# EAGLE board mouthbrain (EAGLE 5.12)
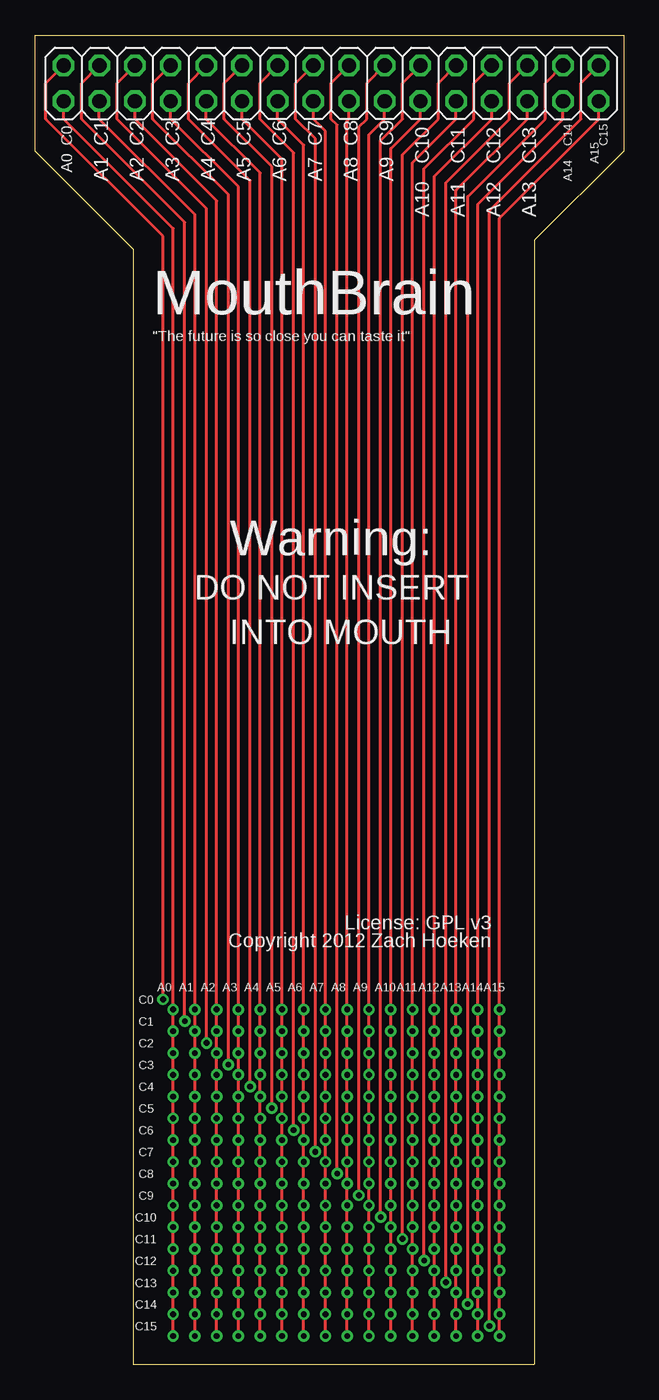
[diagram p0: board, top side]
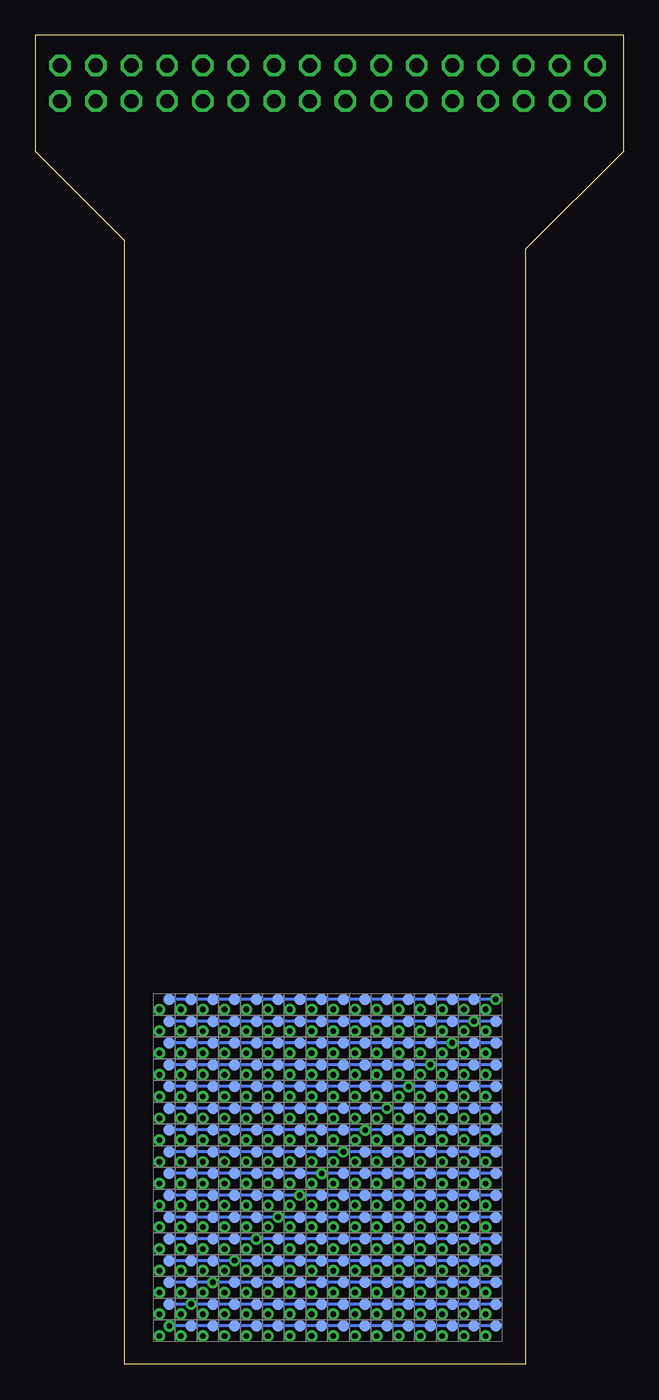
[diagram p1: board, bottom side, seen from below]

Size 41.91 x 94.61 mm. Coordinates in mm from the lower left corner, seen from the top.
Outline: 0,86.36 6.99,79.38 6.99,0 35.56,0 35.56,80.01 41.91,86.36 41.91,94.61 0,94.61 0,86.36
Copper layers (1*16): Top 0.035mm / dielectric 1.5mm / Bottom 0.035mm
Design rules "default *": minimum track width 8mil, minimum drill 16mil, track to track 7mil, track to pad 7mil, pad to pad 7mil, via to via 7mil, smd to smd 7mil, copper to edge 40mil, drill to drill 8mil, minimum pad ring 8mil, minimum via ring 8mil, stop-mask expansion 2mil, vias tented up to drill 0mil, thermal gap 10mil
Net classes: 0 default: width 0.178 mm, clearance 0.178 mm

## Footprints (pad centres in the part's own frame; a part is rotated, then mirrored left to right if it is on the bottom)
2X16 = drill 1.016 octagon: 1 -19.05,-1.27; 2 -19.05,1.27; 3 -16.51,-1.27; 4 -16.51,1.27; 5 -13.97,-1.27; 6 -13.97,1.27; 7 -11.43,-1.27; 8 -11.43,1.27; 9 -8.89,-1.27; 10 -8.89,1.27; 11 -6.35,-1.27; 12 -6.35,1.27; 13 -3.81,-1.27; 14 -3.81,1.27; 15 -1.27,-1.27; 16 -1.27,1.27; 17 1.27,-1.27; 18 1.27,1.27; 19 3.81,-1.27; 20 3.81,1.27; 21 6.35,-1.27; 22 6.35,1.27; 23 8.89,-1.27; 24 8.89,1.27; 25 11.43,-1.27; 26 11.43,1.27; 27 13.97,-1.27; 28 13.97,1.27; 29 16.51,-1.27; 30 16.51,1.27; 31 19.05,-1.27; 32 19.05,1.27
61MIL = drill 0.406 pad 0.813 round: + 0,0 | smd 0.813 x 0.813 rotated 135: - 0.718,0.718
61MILJCT = drill 0.406 pad 0.813 round: + 0,0; - 0.718,0.718

## Placement (x,y rotation side)
JP1  [2X16]  21.08,91.19 0 top
U$1  ELECTRODE60MIL  [61MIL]  9.83,2.02 0 bottom
U$2  ELECTRODE60MIL  [61MIL]  11.38,2.02 0 bottom
U$3  ELECTRODE60MIL  [61MIL]  12.93,2.02 0 bottom
U$4  ELECTRODE60MIL  [61MIL]  14.48,2.02 0 bottom
U$5  ELECTRODE60MIL  [61MIL]  16.03,2.02 0 bottom
U$6  ELECTRODE60MIL  [61MIL]  17.58,2.02 0 bottom
U$7  ELECTRODE60MIL  [61MIL]  19.13,2.02 0 bottom
U$8  ELECTRODE60MIL  [61MIL]  20.68,2.02 0 bottom
U$9  ELECTRODE60MIL  [61MIL]  22.23,2.02 0 bottom
U$10  ELECTRODE60MIL  [61MIL]  23.77,2.02 0 bottom
U$11  ELECTRODE60MIL  [61MIL]  25.32,2.02 0 bottom
U$12  ELECTRODE60MIL  [61MIL]  26.87,2.02 0 bottom
U$13  ELECTRODE60MIL  [61MIL]  28.42,2.02 0 bottom
U$14  ELECTRODE60MIL  [61MIL]  29.97,2.02 0 bottom
U$15  ELECTRODE60MIL  [61MIL]  31.52,2.02 0 bottom
U$16  ELECTRODE61MILJCT  [61MILJCT]  33.07,2.02 0 bottom
U$17  ELECTRODE60MIL  [61MIL]  9.83,3.57 0 bottom
U$18  ELECTRODE60MIL  [61MIL]  11.38,3.57 0 bottom
U$19  ELECTRODE60MIL  [61MIL]  12.93,3.57 0 bottom
U$20  ELECTRODE60MIL  [61MIL]  14.48,3.57 0 bottom
U$21  ELECTRODE60MIL  [61MIL]  16.03,3.57 0 bottom
U$22  ELECTRODE60MIL  [61MIL]  17.58,3.57 0 bottom
U$23  ELECTRODE60MIL  [61MIL]  19.13,3.57 0 bottom
U$24  ELECTRODE60MIL  [61MIL]  20.68,3.57 0 bottom
U$25  ELECTRODE60MIL  [61MIL]  22.23,3.57 0 bottom
U$26  ELECTRODE60MIL  [61MIL]  23.77,3.57 0 bottom
U$27  ELECTRODE60MIL  [61MIL]  25.32,3.57 0 bottom
U$28  ELECTRODE60MIL  [61MIL]  26.87,3.57 0 bottom
U$29  ELECTRODE60MIL  [61MIL]  28.42,3.57 0 bottom
U$30  ELECTRODE60MIL  [61MIL]  29.97,3.57 0 bottom
U$31  ELECTRODE61MILJCT  [61MILJCT]  31.52,3.57 0 bottom
U$32  ELECTRODE60MIL  [61MIL]  33.07,3.57 0 bottom
U$33  ELECTRODE60MIL  [61MIL]  9.83,5.12 0 bottom
U$34  ELECTRODE60MIL  [61MIL]  11.38,5.12 0 bottom
U$35  ELECTRODE60MIL  [61MIL]  12.93,5.12 0 bottom
U$36  ELECTRODE60MIL  [61MIL]  14.48,5.12 0 bottom
U$37  ELECTRODE60MIL  [61MIL]  16.03,5.12 0 bottom
U$38  ELECTRODE60MIL  [61MIL]  17.58,5.12 0 bottom
U$39  ELECTRODE60MIL  [61MIL]  19.13,5.12 0 bottom
U$40  ELECTRODE60MIL  [61MIL]  20.68,5.12 0 bottom
U$41  ELECTRODE60MIL  [61MIL]  22.23,5.12 0 bottom
U$42  ELECTRODE60MIL  [61MIL]  23.77,5.12 0 bottom
U$43  ELECTRODE60MIL  [61MIL]  25.32,5.12 0 bottom
U$44  ELECTRODE60MIL  [61MIL]  26.87,5.12 0 bottom
U$45  ELECTRODE60MIL  [61MIL]  28.42,5.12 0 bottom
U$46  ELECTRODE61MILJCT  [61MILJCT]  29.97,5.12 0 bottom
U$47  ELECTRODE60MIL  [61MIL]  31.52,5.12 0 bottom
U$48  ELECTRODE60MIL  [61MIL]  33.07,5.12 0 bottom
U$49  ELECTRODE60MIL  [61MIL]  9.83,6.67 0 bottom
U$50  ELECTRODE60MIL  [61MIL]  11.38,6.67 0 bottom
U$51  ELECTRODE60MIL  [61MIL]  12.93,6.67 0 bottom
U$52  ELECTRODE60MIL  [61MIL]  14.48,6.67 0 bottom
U$53  ELECTRODE60MIL  [61MIL]  16.03,6.67 0 bottom
U$54  ELECTRODE60MIL  [61MIL]  17.58,6.67 0 bottom
U$55  ELECTRODE60MIL  [61MIL]  19.13,6.67 0 bottom
U$56  ELECTRODE60MIL  [61MIL]  20.68,6.67 0 bottom
U$57  ELECTRODE60MIL  [61MIL]  22.23,6.67 0 bottom
U$58  ELECTRODE60MIL  [61MIL]  23.77,6.67 0 bottom
U$59  ELECTRODE60MIL  [61MIL]  25.32,6.67 0 bottom
U$60  ELECTRODE60MIL  [61MIL]  26.87,6.67 0 bottom
U$61  ELECTRODE61MILJCT  [61MILJCT]  28.42,6.67 0 bottom
U$62  ELECTRODE60MIL  [61MIL]  29.97,6.67 0 bottom
U$63  ELECTRODE60MIL  [61MIL]  31.52,6.67 0 bottom
U$64  ELECTRODE60MIL  [61MIL]  33.07,6.67 0 bottom
U$65  ELECTRODE60MIL  [61MIL]  9.83,8.22 0 bottom
U$66  ELECTRODE60MIL  [61MIL]  11.38,8.22 0 bottom
U$67  ELECTRODE60MIL  [61MIL]  12.93,8.22 0 bottom
U$68  ELECTRODE60MIL  [61MIL]  14.48,8.22 0 bottom
U$69  ELECTRODE60MIL  [61MIL]  16.03,8.22 0 bottom
U$70  ELECTRODE60MIL  [61MIL]  17.58,8.22 0 bottom
U$71  ELECTRODE60MIL  [61MIL]  19.13,8.22 0 bottom
U$72  ELECTRODE60MIL  [61MIL]  20.68,8.22 0 bottom
U$73  ELECTRODE60MIL  [61MIL]  22.23,8.22 0 bottom
U$74  ELECTRODE60MIL  [61MIL]  23.77,8.22 0 bottom
U$75  ELECTRODE60MIL  [61MIL]  25.32,8.22 0 bottom
U$76  ELECTRODE61MILJCT  [61MILJCT]  26.87,8.22 0 bottom
U$77  ELECTRODE60MIL  [61MIL]  28.42,8.22 0 bottom
U$78  ELECTRODE60MIL  [61MIL]  29.97,8.22 0 bottom
U$79  ELECTRODE60MIL  [61MIL]  31.52,8.22 0 bottom
U$80  ELECTRODE60MIL  [61MIL]  33.07,8.22 0 bottom
U$81  ELECTRODE60MIL  [61MIL]  9.83,9.77 0 bottom
U$82  ELECTRODE60MIL  [61MIL]  11.38,9.77 0 bottom
U$83  ELECTRODE60MIL  [61MIL]  12.93,9.77 0 bottom
U$84  ELECTRODE60MIL  [61MIL]  14.48,9.77 0 bottom
U$85  ELECTRODE60MIL  [61MIL]  16.03,9.77 0 bottom
U$86  ELECTRODE60MIL  [61MIL]  17.58,9.77 0 bottom
U$87  ELECTRODE60MIL  [61MIL]  19.13,9.77 0 bottom
U$88  ELECTRODE60MIL  [61MIL]  20.68,9.77 0 bottom
U$89  ELECTRODE60MIL  [61MIL]  22.23,9.77 0 bottom
U$90  ELECTRODE60MIL  [61MIL]  23.77,9.77 0 bottom
U$91  ELECTRODE61MILJCT  [61MILJCT]  25.32,9.77 0 bottom
U$92  ELECTRODE60MIL  [61MIL]  26.87,9.77 0 bottom
U$93  ELECTRODE60MIL  [61MIL]  28.42,9.77 0 bottom
U$94  ELECTRODE60MIL  [61MIL]  29.97,9.77 0 bottom
U$95  ELECTRODE60MIL  [61MIL]  31.52,9.77 0 bottom
U$96  ELECTRODE60MIL  [61MIL]  33.07,9.77 0 bottom
U$97  ELECTRODE60MIL  [61MIL]  9.83,11.32 0 bottom
U$98  ELECTRODE60MIL  [61MIL]  11.38,11.32 0 bottom
U$99  ELECTRODE60MIL  [61MIL]  12.93,11.32 0 bottom
U$100  ELECTRODE60MIL  [61MIL]  14.48,11.32 0 bottom
U$101  ELECTRODE60MIL  [61MIL]  16.03,11.32 0 bottom
U$102  ELECTRODE60MIL  [61MIL]  17.58,11.32 0 bottom
U$103  ELECTRODE60MIL  [61MIL]  19.13,11.32 0 bottom
U$104  ELECTRODE60MIL  [61MIL]  20.68,11.32 0 bottom
U$105  ELECTRODE60MIL  [61MIL]  22.23,11.32 0 bottom
U$106  ELECTRODE61MILJCT  [61MILJCT]  23.77,11.32 0 bottom
U$107  ELECTRODE60MIL  [61MIL]  25.32,11.32 0 bottom
U$108  ELECTRODE60MIL  [61MIL]  26.87,11.32 0 bottom
U$109  ELECTRODE60MIL  [61MIL]  28.42,11.32 0 bottom
U$110  ELECTRODE60MIL  [61MIL]  29.97,11.32 0 bottom
U$111  ELECTRODE60MIL  [61MIL]  31.52,11.32 0 bottom
U$112  ELECTRODE60MIL  [61MIL]  33.07,11.32 0 bottom
U$113  ELECTRODE60MIL  [61MIL]  9.83,12.87 0 bottom
U$114  ELECTRODE60MIL  [61MIL]  11.38,12.87 0 bottom
U$115  ELECTRODE60MIL  [61MIL]  12.93,12.87 0 bottom
U$116  ELECTRODE60MIL  [61MIL]  14.48,12.87 0 bottom
U$117  ELECTRODE60MIL  [61MIL]  16.03,12.87 0 bottom
U$118  ELECTRODE60MIL  [61MIL]  17.58,12.87 0 bottom
U$119  ELECTRODE60MIL  [61MIL]  19.13,12.87 0 bottom
U$120  ELECTRODE60MIL  [61MIL]  20.68,12.87 0 bottom
U$121  ELECTRODE61MILJCT  [61MILJCT]  22.23,12.87 0 bottom
U$122  ELECTRODE60MIL  [61MIL]  23.77,12.87 0 bottom
U$123  ELECTRODE60MIL  [61MIL]  25.32,12.87 0 bottom
U$124  ELECTRODE60MIL  [61MIL]  26.87,12.87 0 bottom
U$125  ELECTRODE60MIL  [61MIL]  28.42,12.87 0 bottom
U$126  ELECTRODE60MIL  [61MIL]  29.97,12.87 0 bottom
U$127  ELECTRODE60MIL  [61MIL]  31.52,12.87 0 bottom
U$128  ELECTRODE60MIL  [61MIL]  33.07,12.87 0 bottom
U$129  ELECTRODE60MIL  [61MIL]  9.83,14.41 0 bottom
U$130  ELECTRODE60MIL  [61MIL]  11.38,14.41 0 bottom
U$131  ELECTRODE60MIL  [61MIL]  12.93,14.41 0 bottom
U$132  ELECTRODE60MIL  [61MIL]  14.48,14.41 0 bottom
U$133  ELECTRODE60MIL  [61MIL]  16.03,14.41 0 bottom
U$134  ELECTRODE60MIL  [61MIL]  17.58,14.41 0 bottom
U$135  ELECTRODE60MIL  [61MIL]  19.13,14.41 0 bottom
U$136  ELECTRODE61MILJCT  [61MILJCT]  20.68,14.41 0 bottom
U$137  ELECTRODE60MIL  [61MIL]  22.23,14.41 0 bottom
U$138  ELECTRODE60MIL  [61MIL]  23.77,14.41 0 bottom
U$139  ELECTRODE60MIL  [61MIL]  25.32,14.41 0 bottom
U$140  ELECTRODE60MIL  [61MIL]  26.87,14.41 0 bottom
U$141  ELECTRODE60MIL  [61MIL]  28.42,14.41 0 bottom
U$142  ELECTRODE60MIL  [61MIL]  29.97,14.41 0 bottom
U$143  ELECTRODE60MIL  [61MIL]  31.52,14.41 0 bottom
U$144  ELECTRODE60MIL  [61MIL]  33.07,14.41 0 bottom
U$145  ELECTRODE60MIL  [61MIL]  9.83,15.96 0 bottom
U$146  ELECTRODE60MIL  [61MIL]  11.38,15.96 0 bottom
U$147  ELECTRODE60MIL  [61MIL]  12.93,15.96 0 bottom
U$148  ELECTRODE60MIL  [61MIL]  14.48,15.96 0 bottom
U$149  ELECTRODE60MIL  [61MIL]  16.03,15.96 0 bottom
U$150  ELECTRODE60MIL  [61MIL]  17.58,15.96 0 bottom
U$151  ELECTRODE61MILJCT  [61MILJCT]  19.13,15.96 0 bottom
U$152  ELECTRODE60MIL  [61MIL]  20.68,15.96 0 bottom
U$153  ELECTRODE60MIL  [61MIL]  22.23,15.96 0 bottom
U$154  ELECTRODE60MIL  [61MIL]  23.77,15.96 0 bottom
U$155  ELECTRODE60MIL  [61MIL]  25.32,15.96 0 bottom
U$156  ELECTRODE60MIL  [61MIL]  26.87,15.96 0 bottom
U$157  ELECTRODE60MIL  [61MIL]  28.42,15.96 0 bottom
U$158  ELECTRODE60MIL  [61MIL]  29.97,15.96 0 bottom
U$159  ELECTRODE60MIL  [61MIL]  31.52,15.96 0 bottom
U$160  ELECTRODE60MIL  [61MIL]  33.07,15.96 0 bottom
U$161  ELECTRODE60MIL  [61MIL]  9.83,17.51 0 bottom
U$162  ELECTRODE60MIL  [61MIL]  11.38,17.51 0 bottom
U$163  ELECTRODE60MIL  [61MIL]  12.93,17.51 0 bottom
U$164  ELECTRODE60MIL  [61MIL]  14.48,17.51 0 bottom
U$165  ELECTRODE60MIL  [61MIL]  16.03,17.51 0 bottom
U$166  ELECTRODE61MILJCT  [61MILJCT]  17.58,17.51 0 bottom
U$167  ELECTRODE60MIL  [61MIL]  19.13,17.51 0 bottom
U$168  ELECTRODE60MIL  [61MIL]  20.68,17.51 0 bottom
U$169  ELECTRODE60MIL  [61MIL]  22.23,17.51 0 bottom
U$170  ELECTRODE60MIL  [61MIL]  23.77,17.51 0 bottom
U$171  ELECTRODE60MIL  [61MIL]  25.32,17.51 0 bottom
U$172  ELECTRODE60MIL  [61MIL]  26.87,17.51 0 bottom
U$173  ELECTRODE60MIL  [61MIL]  28.42,17.51 0 bottom
U$174  ELECTRODE60MIL  [61MIL]  29.97,17.51 0 bottom
U$175  ELECTRODE60MIL  [61MIL]  31.52,17.51 0 bottom
U$176  ELECTRODE60MIL  [61MIL]  33.07,17.51 0 bottom
U$177  ELECTRODE60MIL  [61MIL]  9.83,19.06 0 bottom
U$178  ELECTRODE60MIL  [61MIL]  11.38,19.06 0 bottom
U$179  ELECTRODE60MIL  [61MIL]  12.93,19.06 0 bottom
U$180  ELECTRODE60MIL  [61MIL]  14.48,19.06 0 bottom
U$181  ELECTRODE61MILJCT  [61MILJCT]  16.03,19.06 0 bottom
U$182  ELECTRODE60MIL  [61MIL]  17.58,19.06 0 bottom
U$183  ELECTRODE60MIL  [61MIL]  19.13,19.06 0 bottom
U$184  ELECTRODE60MIL  [61MIL]  20.68,19.06 0 bottom
U$185  ELECTRODE60MIL  [61MIL]  22.23,19.06 0 bottom
U$186  ELECTRODE60MIL  [61MIL]  23.77,19.06 0 bottom
U$187  ELECTRODE60MIL  [61MIL]  25.32,19.06 0 bottom
U$188  ELECTRODE60MIL  [61MIL]  26.87,19.06 0 bottom
U$189  ELECTRODE60MIL  [61MIL]  28.42,19.06 0 bottom
U$190  ELECTRODE60MIL  [61MIL]  29.97,19.06 0 bottom
U$191  ELECTRODE60MIL  [61MIL]  31.52,19.06 0 bottom
U$192  ELECTRODE60MIL  [61MIL]  33.07,19.06 0 bottom
U$193  ELECTRODE60MIL  [61MIL]  9.83,20.61 0 bottom
U$194  ELECTRODE60MIL  [61MIL]  11.38,20.61 0 bottom
U$195  ELECTRODE60MIL  [61MIL]  12.93,20.61 0 bottom
U$196  ELECTRODE61MILJCT  [61MILJCT]  14.48,20.61 0 bottom
U$197  ELECTRODE60MIL  [61MIL]  16.03,20.61 0 bottom
U$198  ELECTRODE60MIL  [61MIL]  17.58,20.61 0 bottom
U$199  ELECTRODE60MIL  [61MIL]  19.13,20.61 0 bottom
U$200  ELECTRODE60MIL  [61MIL]  20.68,20.61 0 bottom
U$201  ELECTRODE60MIL  [61MIL]  22.23,20.61 0 bottom
U$202  ELECTRODE60MIL  [61MIL]  23.77,20.61 0 bottom
U$203  ELECTRODE60MIL  [61MIL]  25.32,20.61 0 bottom
U$204  ELECTRODE60MIL  [61MIL]  26.87,20.61 0 bottom
U$205  ELECTRODE60MIL  [61MIL]  28.42,20.61 0 bottom
U$206  ELECTRODE60MIL  [61MIL]  29.97,20.61 0 bottom
U$207  ELECTRODE60MIL  [61MIL]  31.52,20.61 0 bottom
U$208  ELECTRODE60MIL  [61MIL]  33.07,20.61 0 bottom
U$209  ELECTRODE60MIL  [61MIL]  9.83,22.16 0 bottom
U$210  ELECTRODE60MIL  [61MIL]  11.38,22.16 0 bottom
U$211  ELECTRODE61MILJCT  [61MILJCT]  12.93,22.16 0 bottom
U$212  ELECTRODE60MIL  [61MIL]  14.48,22.16 0 bottom
U$213  ELECTRODE60MIL  [61MIL]  16.03,22.16 0 bottom
U$214  ELECTRODE60MIL  [61MIL]  17.58,22.16 0 bottom
U$215  ELECTRODE60MIL  [61MIL]  19.13,22.16 0 bottom
U$216  ELECTRODE60MIL  [61MIL]  20.68,22.16 0 bottom
U$217  ELECTRODE60MIL  [61MIL]  22.23,22.16 0 bottom
U$218  ELECTRODE60MIL  [61MIL]  23.77,22.16 0 bottom
U$219  ELECTRODE60MIL  [61MIL]  25.32,22.16 0 bottom
U$220  ELECTRODE60MIL  [61MIL]  26.87,22.16 0 bottom
U$221  ELECTRODE60MIL  [61MIL]  28.42,22.16 0 bottom
U$222  ELECTRODE60MIL  [61MIL]  29.97,22.16 0 bottom
U$223  ELECTRODE60MIL  [61MIL]  31.52,22.16 0 bottom
U$224  ELECTRODE60MIL  [61MIL]  33.07,22.16 0 bottom
U$225  ELECTRODE60MIL  [61MIL]  9.83,23.71 0 bottom
U$226  ELECTRODE61MILJCT  [61MILJCT]  11.38,23.71 0 bottom
U$227  ELECTRODE60MIL  [61MIL]  12.93,23.71 0 bottom
U$228  ELECTRODE60MIL  [61MIL]  14.48,23.71 0 bottom
U$229  ELECTRODE60MIL  [61MIL]  16.03,23.71 0 bottom
U$230  ELECTRODE60MIL  [61MIL]  17.58,23.71 0 bottom
U$231  ELECTRODE60MIL  [61MIL]  19.13,23.71 0 bottom
U$232  ELECTRODE60MIL  [61MIL]  20.68,23.71 0 bottom
U$233  ELECTRODE60MIL  [61MIL]  22.23,23.71 0 bottom
U$234  ELECTRODE60MIL  [61MIL]  23.77,23.71 0 bottom
U$235  ELECTRODE60MIL  [61MIL]  25.32,23.71 0 bottom
U$236  ELECTRODE60MIL  [61MIL]  26.87,23.71 0 bottom
U$237  ELECTRODE60MIL  [61MIL]  28.42,23.71 0 bottom
U$238  ELECTRODE60MIL  [61MIL]  29.97,23.71 0 bottom
U$239  ELECTRODE60MIL  [61MIL]  31.52,23.71 0 bottom
U$240  ELECTRODE60MIL  [61MIL]  33.07,23.71 0 bottom
U$241  ELECTRODE61MILJCT  [61MILJCT]  9.83,25.26 0 bottom
U$242  ELECTRODE60MIL  [61MIL]  11.38,25.26 0 bottom
U$243  ELECTRODE60MIL  [61MIL]  12.93,25.26 0 bottom
U$244  ELECTRODE60MIL  [61MIL]  14.48,25.26 0 bottom
U$245  ELECTRODE60MIL  [61MIL]  16.03,25.26 0 bottom
U$246  ELECTRODE60MIL  [61MIL]  17.58,25.26 0 bottom
U$247  ELECTRODE60MIL  [61MIL]  19.13,25.26 0 bottom
U$248  ELECTRODE60MIL  [61MIL]  20.68,25.26 0 bottom
U$249  ELECTRODE60MIL  [61MIL]  22.23,25.26 0 bottom
U$250  ELECTRODE60MIL  [61MIL]  23.77,25.26 0 bottom
U$251  ELECTRODE60MIL  [61MIL]  25.32,25.26 0 bottom
U$252  ELECTRODE60MIL  [61MIL]  26.87,25.26 0 bottom
U$253  ELECTRODE60MIL  [61MIL]  28.42,25.26 0 bottom
U$254  ELECTRODE60MIL  [61MIL]  29.97,25.26 0 bottom
U$255  ELECTRODE60MIL  [61MIL]  31.52,25.26 0 bottom
U$256  ELECTRODE60MIL  [61MIL]  33.07,25.26 0 bottom

## Library data of the parts
JP1 = pinhead
U$1-U$256 = Hoeken

## Nets
A0: JP1.1 U$1.+ U$17.+ U$33.+ U$49.+ U$65.+ U$81.+ U$97.+ U$113.+ U$129.+ U$145.+ U$161.+ U$177.+ U$193.+ U$209.+ U$225.+ U$241.+
A1: JP1.3 U$2.+ U$18.+ U$34.+ U$50.+ U$66.+ U$82.+ U$98.+ U$114.+ U$130.+ U$146.+ U$162.+ U$178.+ U$194.+ U$210.+ U$226.+ U$242.+
A2: JP1.5 U$3.+ U$19.+ U$35.+ U$51.+ U$67.+ U$83.+ U$99.+ U$115.+ U$131.+ U$147.+ U$163.+ U$179.+ U$195.+ U$211.+ U$227.+ U$243.+
A3: JP1.7 U$4.+ U$20.+ U$36.+ U$52.+ U$68.+ U$84.+ U$100.+ U$116.+ U$132.+ U$148.+ U$164.+ U$180.+ U$196.+ U$212.+ U$228.+ U$244.+
A4: JP1.9 U$5.+ U$21.+ U$37.+ U$53.+ U$69.+ U$85.+ U$101.+ U$117.+ U$133.+ U$149.+ U$165.+ U$181.+ U$197.+ U$213.+ U$229.+ U$245.+
A5: JP1.11 U$6.+ U$22.+ U$38.+ U$54.+ U$70.+ U$86.+ U$102.+ U$118.+ U$134.+ U$150.+ U$166.+ U$182.+ U$198.+ U$214.+ U$230.+ U$246.+
A6: JP1.13 U$7.+ U$23.+ U$39.+ U$55.+ U$71.+ U$87.+ U$103.+ U$119.+ U$135.+ U$151.+ U$167.+ U$183.+ U$199.+ U$215.+ U$231.+ U$247.+
A7: JP1.15 U$8.+ U$24.+ U$40.+ U$56.+ U$72.+ U$88.+ U$104.+ U$120.+ U$136.+ U$152.+ U$168.+ U$184.+ U$200.+ U$216.+ U$232.+ U$248.+
A8: JP1.17 U$9.+ U$25.+ U$41.+ U$57.+ U$73.+ U$89.+ U$105.+ U$121.+ U$137.+ U$153.+ U$169.+ U$185.+ U$201.+ U$217.+ U$233.+ U$249.+
A9: JP1.19 U$10.+ U$26.+ U$42.+ U$58.+ U$74.+ U$90.+ U$106.+ U$122.+ U$138.+ U$154.+ U$170.+ U$186.+ U$202.+ U$218.+ U$234.+ U$250.+
A10: JP1.21 U$11.+ U$27.+ U$43.+ U$59.+ U$75.+ U$91.+ U$107.+ U$123.+ U$139.+ U$155.+ U$171.+ U$187.+ U$203.+ U$219.+ U$235.+ U$251.+
A11: JP1.23 U$12.+ U$28.+ U$44.+ U$60.+ U$76.+ U$92.+ U$108.+ U$124.+ U$140.+ U$156.+ U$172.+ U$188.+ U$204.+ U$220.+ U$236.+ U$252.+
A12: JP1.25 U$13.+ U$29.+ U$45.+ U$61.+ U$77.+ U$93.+ U$109.+ U$125.+ U$141.+ U$157.+ U$173.+ U$189.+ U$205.+ U$221.+ U$237.+ U$253.+
A13: JP1.27 U$14.+ U$30.+ U$46.+ U$62.+ U$78.+ U$94.+ U$110.+ U$126.+ U$142.+ U$158.+ U$174.+ U$190.+ U$206.+ U$222.+ U$238.+ U$254.+
A14: JP1.29 U$15.+ U$31.+ U$47.+ U$63.+ U$79.+ U$95.+ U$111.+ U$127.+ U$143.+ U$159.+ U$175.+ U$191.+ U$207.+ U$223.+ U$239.+ U$255.+
A15: JP1.31 U$16.+ U$32.+ U$48.+ U$64.+ U$80.+ U$96.+ U$112.+ U$128.+ U$144.+ U$160.+ U$176.+ U$192.+ U$208.+ U$224.+ U$240.+ U$256.+
C0: JP1.2 U$241.- U$242.- U$243.- U$244.- U$245.- U$246.- U$247.- U$248.- U$249.- U$250.- U$251.- U$252.- U$253.- U$254.- U$255.- U$256.-
C1: JP1.4 U$225.- U$226.- U$227.- U$228.- U$229.- U$230.- U$231.- U$232.- U$233.- U$234.- U$235.- U$236.- U$237.- U$238.- U$239.- U$240.-
C2: JP1.6 U$209.- U$210.- U$211.- U$212.- U$213.- U$214.- U$215.- U$216.- U$217.- U$218.- U$219.- U$220.- U$221.- U$222.- U$223.- U$224.-
C3: JP1.8 U$193.- U$194.- U$195.- U$196.- U$197.- U$198.- U$199.- U$200.- U$201.- U$202.- U$203.- U$204.- U$205.- U$206.- U$207.- U$208.-
C4: JP1.10 U$177.- U$178.- U$179.- U$180.- U$181.- U$182.- U$183.- U$184.- U$185.- U$186.- U$187.- U$188.- U$189.- U$190.- U$191.- U$192.-
C5: JP1.12 U$161.- U$162.- U$163.- U$164.- U$165.- U$166.- U$167.- U$168.- U$169.- U$170.- U$171.- U$172.- U$173.- U$174.- U$175.- U$176.-
C6: JP1.14 U$145.- U$146.- U$147.- U$148.- U$149.- U$150.- U$151.- U$152.- U$153.- U$154.- U$155.- U$156.- U$157.- U$158.- U$159.- U$160.-
C7: JP1.16 U$129.- U$130.- U$131.- U$132.- U$133.- U$134.- U$135.- U$136.- U$137.- U$138.- U$139.- U$140.- U$141.- U$142.- U$143.- U$144.-
C8: JP1.18 U$113.- U$114.- U$115.- U$116.- U$117.- U$118.- U$119.- U$120.- U$121.- U$122.- U$123.- U$124.- U$125.- U$126.- U$127.- U$128.-
C9: JP1.20 U$97.- U$98.- U$99.- U$100.- U$101.- U$102.- U$103.- U$104.- U$105.- U$106.- U$107.- U$108.- U$109.- U$110.- U$111.- U$112.-
C10: JP1.22 U$81.- U$82.- U$83.- U$84.- U$85.- U$86.- U$87.- U$88.- U$89.- U$90.- U$91.- U$92.- U$93.- U$94.- U$95.- U$96.-
C11: JP1.24 U$65.- U$66.- U$67.- U$68.- U$69.- U$70.- U$71.- U$72.- U$73.- U$74.- U$75.- U$76.- U$77.- U$78.- U$79.- U$80.-
C12: JP1.26 U$49.- U$50.- U$51.- U$52.- U$53.- U$54.- U$55.- U$56.- U$57.- U$58.- U$59.- U$60.- U$61.- U$62.- U$63.- U$64.-
C13: JP1.28 U$33.- U$34.- U$35.- U$36.- U$37.- U$38.- U$39.- U$40.- U$41.- U$42.- U$43.- U$44.- U$45.- U$46.- U$47.- U$48.-
C14: JP1.30 U$17.- U$18.- U$19.- U$20.- U$21.- U$22.- U$23.- U$24.- U$25.- U$26.- U$27.- U$28.- U$29.- U$30.- U$31.- U$32.-
C15: JP1.32 U$1.- U$2.- U$3.- U$4.- U$5.- U$6.- U$7.- U$8.- U$9.- U$10.- U$11.- U$12.- U$13.- U$14.- U$15.- U$16.-

## Tracks (layer width: path | path; a pad name or v marks a point on that pad's centre or on a via)
A0
  Top 0.203: U$1.+ U$17.+ U$33.+ U$49.+ U$65.+ U$81.+ U$97.+ U$113.+ U$129.+ U$145.+ U$161.+ U$177.+ U$193.+ U$209.+ U$225.+ U$241.+ 9.83,80.85 2.03,88.65 JP1.1
A1
  Top 0.203: U$2.+ U$18.+ U$34.+ U$50.+ U$66.+ U$82.+ U$98.+ U$114.+ U$130.+ U$146.+ U$162.+ U$178.+ U$194.+ U$210.+ U$226.+ U$242.+ 11.38,81.84 4.57,88.65 JP1.3
A2
  Top 0.203: U$3.+ U$19.+ U$35.+ U$51.+ U$67.+ U$83.+ U$99.+ U$115.+ U$131.+ U$147.+ U$163.+ U$179.+ U$195.+ U$211.+ U$227.+ U$243.+ 12.93,82.83 7.11,88.65 JP1.5
A3
  Top 0.203: U$4.+ U$20.+ U$36.+ U$52.+ U$68.+ U$84.+ U$100.+ U$116.+ U$132.+ U$148.+ U$164.+ U$180.+ U$196.+ U$212.+ U$228.+ U$244.+ 14.48,83.82 9.65,88.65 JP1.7
A4
  Top 0.203: U$5.+ U$21.+ U$37.+ U$53.+ U$69.+ U$85.+ U$101.+ U$117.+ U$133.+ U$149.+ U$165.+ U$181.+ U$197.+ U$213.+ U$229.+ U$245.+ 16.03,84.81 12.19,88.65 JP1.9
A5
  Top 0.203: U$6.+ U$22.+ U$38.+ U$54.+ U$70.+ U$86.+ U$102.+ U$118.+ U$134.+ U$150.+ U$166.+ U$182.+ U$198.+ U$214.+ U$230.+ U$246.+ 17.58,85.8 14.73,88.65 JP1.11
A6
  Top 0.203: U$7.+ U$23.+ U$39.+ U$55.+ U$71.+ U$87.+ U$103.+ U$119.+ U$135.+ U$151.+ U$167.+ U$183.+ U$199.+ U$215.+ U$231.+ U$247.+ 19.13,86.79 17.27,88.65 JP1.13
A7
  Top 0.203: U$8.+ U$24.+ U$40.+ U$56.+ U$72.+ U$88.+ U$104.+ U$120.+ U$136.+ U$152.+ U$168.+ U$184.+ U$200.+ U$216.+ U$232.+ U$248.+ 20.68,87.78 19.81,88.65 JP1.15
A8
  Top 0.203: U$9.+ U$25.+ U$41.+ U$57.+ U$73.+ U$89.+ U$105.+ U$121.+ U$137.+ U$153.+ U$169.+ U$185.+ U$201.+ U$217.+ U$233.+ U$249.+ 22.23,88.52 22.35,88.65 JP1.17
A9
  Top 0.203: U$10.+ U$26.+ U$42.+ U$58.+ U$74.+ U$90.+ U$106.+ U$122.+ U$138.+ U$154.+ U$170.+ U$186.+ U$202.+ U$218.+ U$234.+ U$250.+ 23.77,87.53 24.89,88.65 JP1.19
A10
  Top 0.203: U$11.+ U$27.+ U$43.+ U$59.+ U$75.+ U$91.+ U$107.+ U$123.+ U$139.+ U$155.+ U$171.+ U$187.+ U$203.+ U$219.+ U$235.+ U$251.+ 25.32,86.54 27.43,88.65 JP1.21
A11
  Top 0.203: U$12.+ U$28.+ U$44.+ U$60.+ U$76.+ U$92.+ U$108.+ U$124.+ U$140.+ U$156.+ U$172.+ U$188.+ U$204.+ U$220.+ U$236.+ U$252.+ 26.87,85.55 29.97,88.65 JP1.23
A12
  Top 0.203: U$13.+ U$29.+ U$45.+ U$61.+ U$77.+ U$93.+ U$109.+ U$125.+ U$141.+ U$157.+ U$173.+ U$189.+ U$205.+ U$221.+ U$237.+ U$253.+ 28.42,84.56 32.51,88.65 JP1.25
A13
  Top 0.203: U$14.+ U$30.+ U$46.+ U$62.+ U$78.+ U$94.+ U$110.+ U$126.+ U$142.+ U$158.+ U$174.+ U$190.+ U$206.+ U$222.+ U$238.+ U$254.+ 29.97,83.57 35.05,88.65 JP1.27
A14
  Top 0.203: U$15.+ U$31.+ U$47.+ U$63.+ U$79.+ U$95.+ U$111.+ U$127.+ U$143.+ U$159.+ U$175.+ U$191.+ U$207.+ U$223.+ U$239.+ U$255.+ 31.52,82.58 37.59,88.65 JP1.29
A15
  Top 0.203: U$16.+ U$32.+ U$48.+ U$64.+ U$80.+ U$96.+ U$112.+ U$128.+ U$144.+ U$160.+ U$176.+ U$192.+ U$208.+ U$224.+ U$240.+ U$256.+ 33.07,81.58 40.13,88.65 JP1.31
C0
  Top 0.203: U$241.- 9.11,80.3 0.76,88.65 0.76,91.19 JP1.2
  Bottom 0.203: U$241.- U$242.- U$243.- U$244.- U$245.- U$246.- U$247.- U$248.- U$249.- U$250.- U$251.- U$252.- U$253.- U$254.- U$255.- U$256.-
C1
  Top 0.203: U$226.- 10.66,81.29 3.3,88.65 3.3,91.19 JP1.4
  Bottom 0.203: U$240.- U$239.- U$238.- U$237.- U$236.- U$235.- U$234.- U$233.- U$232.- U$231.- U$230.- U$229.- U$228.- U$227.- U$226.- U$225.-
C2
  Top 0.203: U$211.- 12.21,82.28 5.84,88.65 5.84,91.19 JP1.6
  Bottom 0.203: U$209.- U$210.- U$211.- U$212.- U$213.- U$214.- U$215.- U$216.- U$217.- U$218.- U$219.- U$220.- U$221.- U$222.- U$223.- U$224.-
C3
  Top 0.203: U$196.- 13.76,83.27 8.38,88.65 8.38,91.19 JP1.8
  Bottom 0.203: U$208.- U$207.- U$206.- U$205.- U$204.- U$203.- U$202.- U$201.- U$200.- U$199.- U$198.- U$197.- U$196.- U$195.- U$194.- U$193.-
C4
  Top 0.203: U$181.- 15.31,84.26 10.92,88.65 10.92,91.19 JP1.10
  Bottom 0.203: U$177.- U$178.- U$179.- U$180.- U$181.- U$182.- U$183.- U$184.- U$185.- U$186.- U$187.- U$188.- U$189.- U$190.- U$191.- U$192.-
C5
  Top 0.203: U$166.- 16.86,85.25 13.46,88.65 13.46,91.19 JP1.12
  Bottom 0.203: U$176.- U$175.- U$174.- U$173.- U$172.- U$171.- U$170.- U$169.- U$168.- U$167.- U$166.- U$165.- U$164.- U$163.- U$162.- U$161.-
C6
  Top 0.203: U$151.- 18.41,86.24 16,88.65 16,91.19 JP1.14
  Bottom 0.203: U$145.- U$146.- U$147.- U$148.- U$149.- U$150.- U$151.- U$152.- U$153.- U$154.- U$155.- U$156.- U$157.- U$158.- U$159.- U$160.-
C7
  Top 0.203: U$136.- 19.96,87.23 18.54,88.65 18.54,91.19 JP1.16
  Bottom 0.203: U$144.- U$143.- U$142.- U$141.- U$140.- U$139.- U$138.- U$137.- U$136.- U$135.- U$134.- U$133.- U$132.- U$131.- U$130.- U$129.-
C8
  Top 0.203: U$121.- 21.51,88.22 21.08,88.65 21.08,91.19 JP1.18
  Bottom 0.203: U$113.- U$114.- U$115.- U$116.- U$117.- U$118.- U$119.- U$120.- U$121.- U$122.- U$123.- U$124.- U$125.- U$126.- U$127.- U$128.-
C9
  Top 0.203: U$106.- 23.06,88.08 23.62,88.65 23.62,91.19 JP1.20
  Bottom 0.203: U$112.- U$111.- U$110.- U$109.- U$108.- U$107.- U$106.- U$105.- U$104.- U$103.- U$102.- U$101.- U$100.- U$99.- U$98.- U$97.-
C10
  Top 0.203: U$91.- 24.61,87.09 26.16,88.65 26.16,91.19 JP1.22
  Bottom 0.203: U$81.- U$82.- U$83.- U$84.- U$85.- U$86.- U$87.- U$88.- U$89.- U$90.- U$91.- U$92.- U$93.- U$94.- U$95.- U$96.-
C11
  Top 0.203: U$76.- 26.16,86.1 28.7,88.65 28.7,91.19 JP1.24
  Bottom 0.203: U$65.- U$66.- U$67.- U$68.- U$69.- U$70.- U$71.- U$72.- U$73.- U$74.- U$75.- U$76.- U$77.- U$78.- U$79.- U$80.-
C12
  Top 0.203: U$61.- 27.7,85.11 31.24,88.65 31.24,91.19 JP1.26
  Bottom 0.203: U$64.- U$63.- U$62.- U$61.- U$60.- U$59.- U$58.- U$57.- U$56.- U$55.- U$54.- U$53.- U$52.- U$51.- U$50.- U$49.-
C13
  Top 0.203: U$46.- 29.25,84.12 33.78,88.65 33.78,91.19 JP1.28
  Bottom 0.203: U$33.- U$34.- U$35.- U$36.- U$37.- U$38.- U$39.- U$40.- U$41.- U$42.- U$43.- U$44.- U$45.- U$46.- U$47.- U$48.-
C14
  Top 0.203: U$31.- 30.8,83.13 36.32,88.65 36.32,91.19 JP1.30
  Bottom 0.203: U$32.- U$31.- U$30.- U$29.- U$28.- U$27.- U$26.- U$25.- U$24.- U$23.- U$22.- U$21.- U$20.- U$19.- U$18.- U$17.-
C15
  Top 0.203: U$16.- 32.35,82.14 38.86,88.65 38.86,91.19 JP1.32
  Bottom 0.203: U$16.- U$15.- U$14.- U$13.- U$12.- U$11.- U$10.- U$9.- U$8.- U$7.- U$6.- U$5.- U$4.- U$3.- U$2.- U$1.-

## Text on the board
tPlace: C0 | C1 | C2 | C3 | C4 | C5 | C6 | C7 | C8 | C9 | C14 | C15 | A0 | C10 | C11 | C12 | C13 | A15 | A1 | A2 | A3 | A4 | A5 | A6 | A7 | A8 | A9 | A14 | A10 | A11 | A12 | A13 | MouthBrain | "The future is so close you can taste it" | Warning: | DO NOT INSERT | INTO MOUTH | License: GPL v3 | Copyright 2012 Zach Hoeken | A0 | A1 | A2 | A3 | A4 | A5 | A6 | A7 | A8 | A9 | A10 | A11 | A12 | A13 | A14 | A15 | C0 | C1 | C2 | C3 | C4 | C5 | C6 | C7 | C8 | C9 | C10 | C11 | C12 | C13 | C14 | C15